# Altium PCB Coordinator5-10.21.PcbDoc (part 1 of 2)
Units mm, origin at the board's own origin, x right, y up, seen from the top; angles counter-clockwise.
Board outline 176.26 x 127.25 mm, 2 copper layers (Top Layer, Bottom Layer); 117 components, 155 nets, 547 pads, 228 vias.
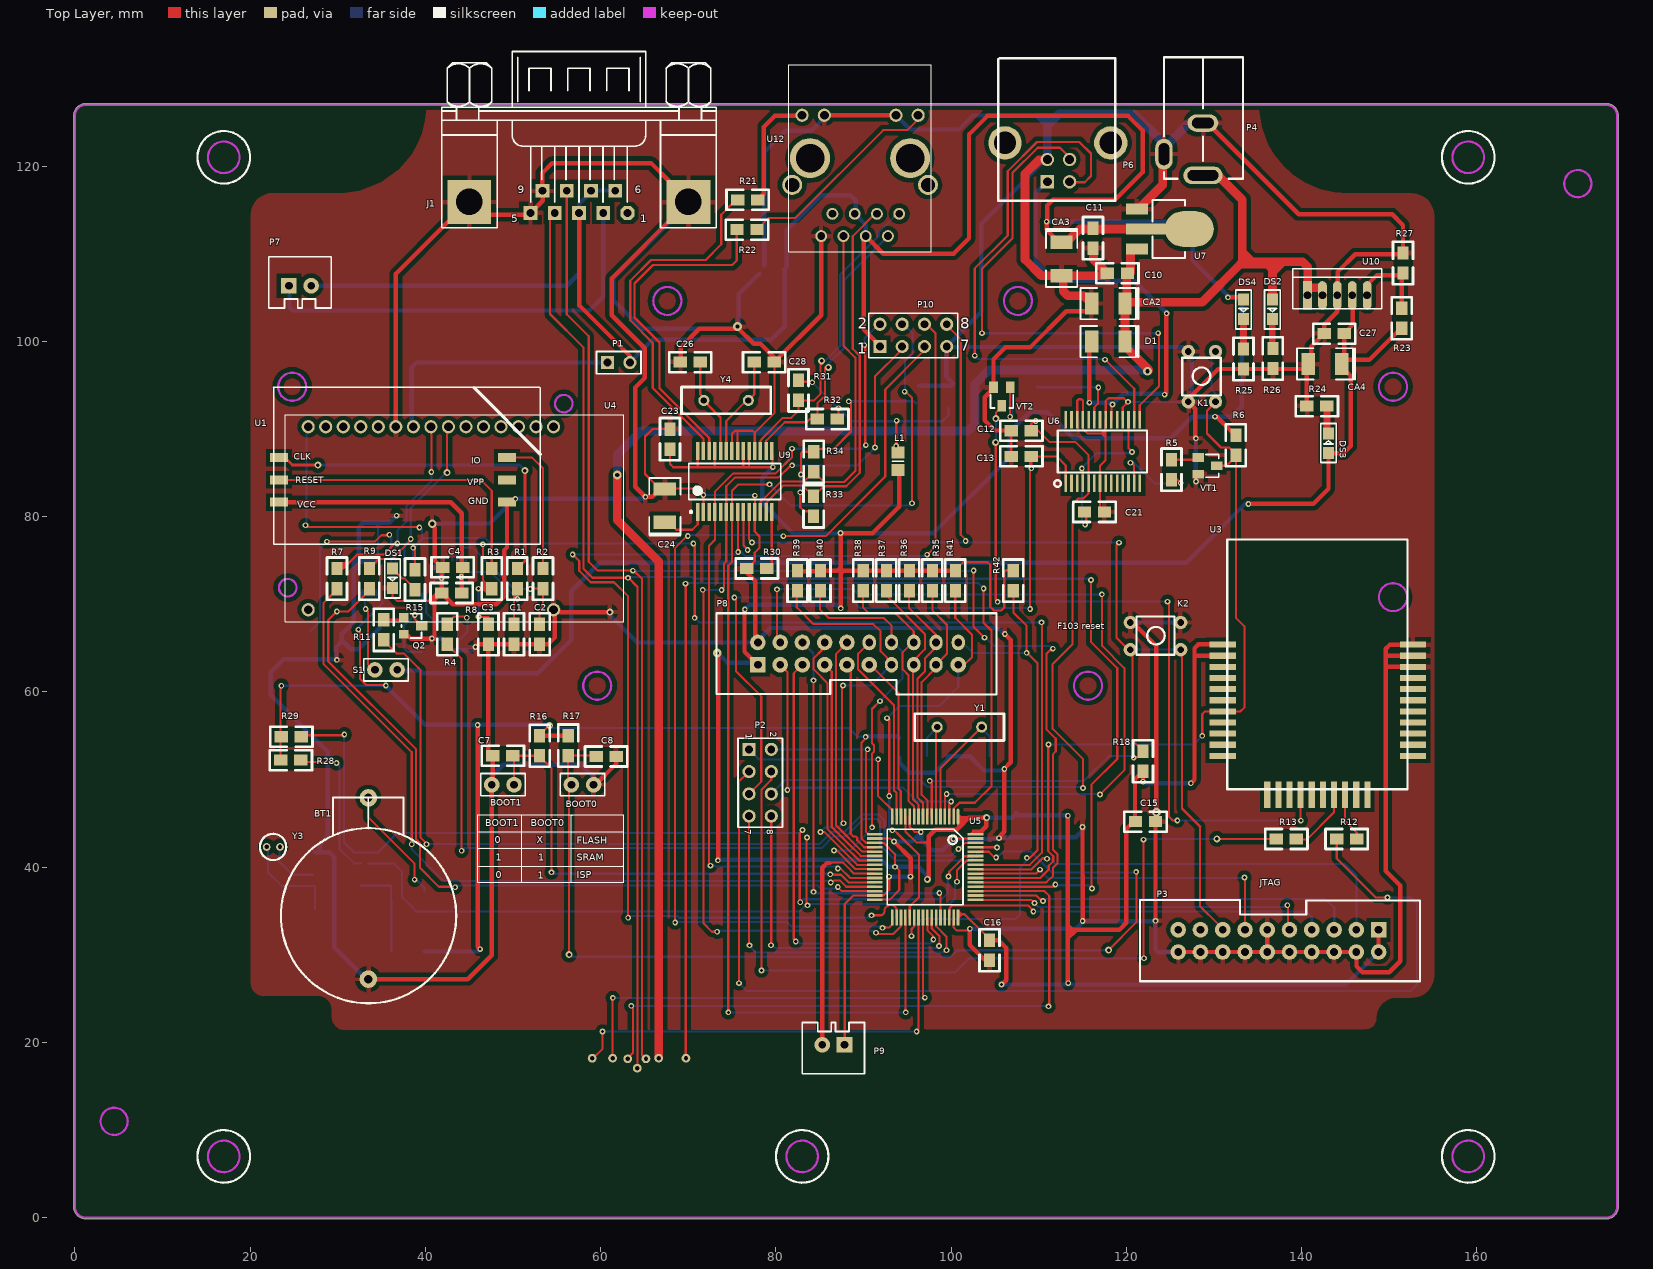
[diagram p0: Top Layer view]
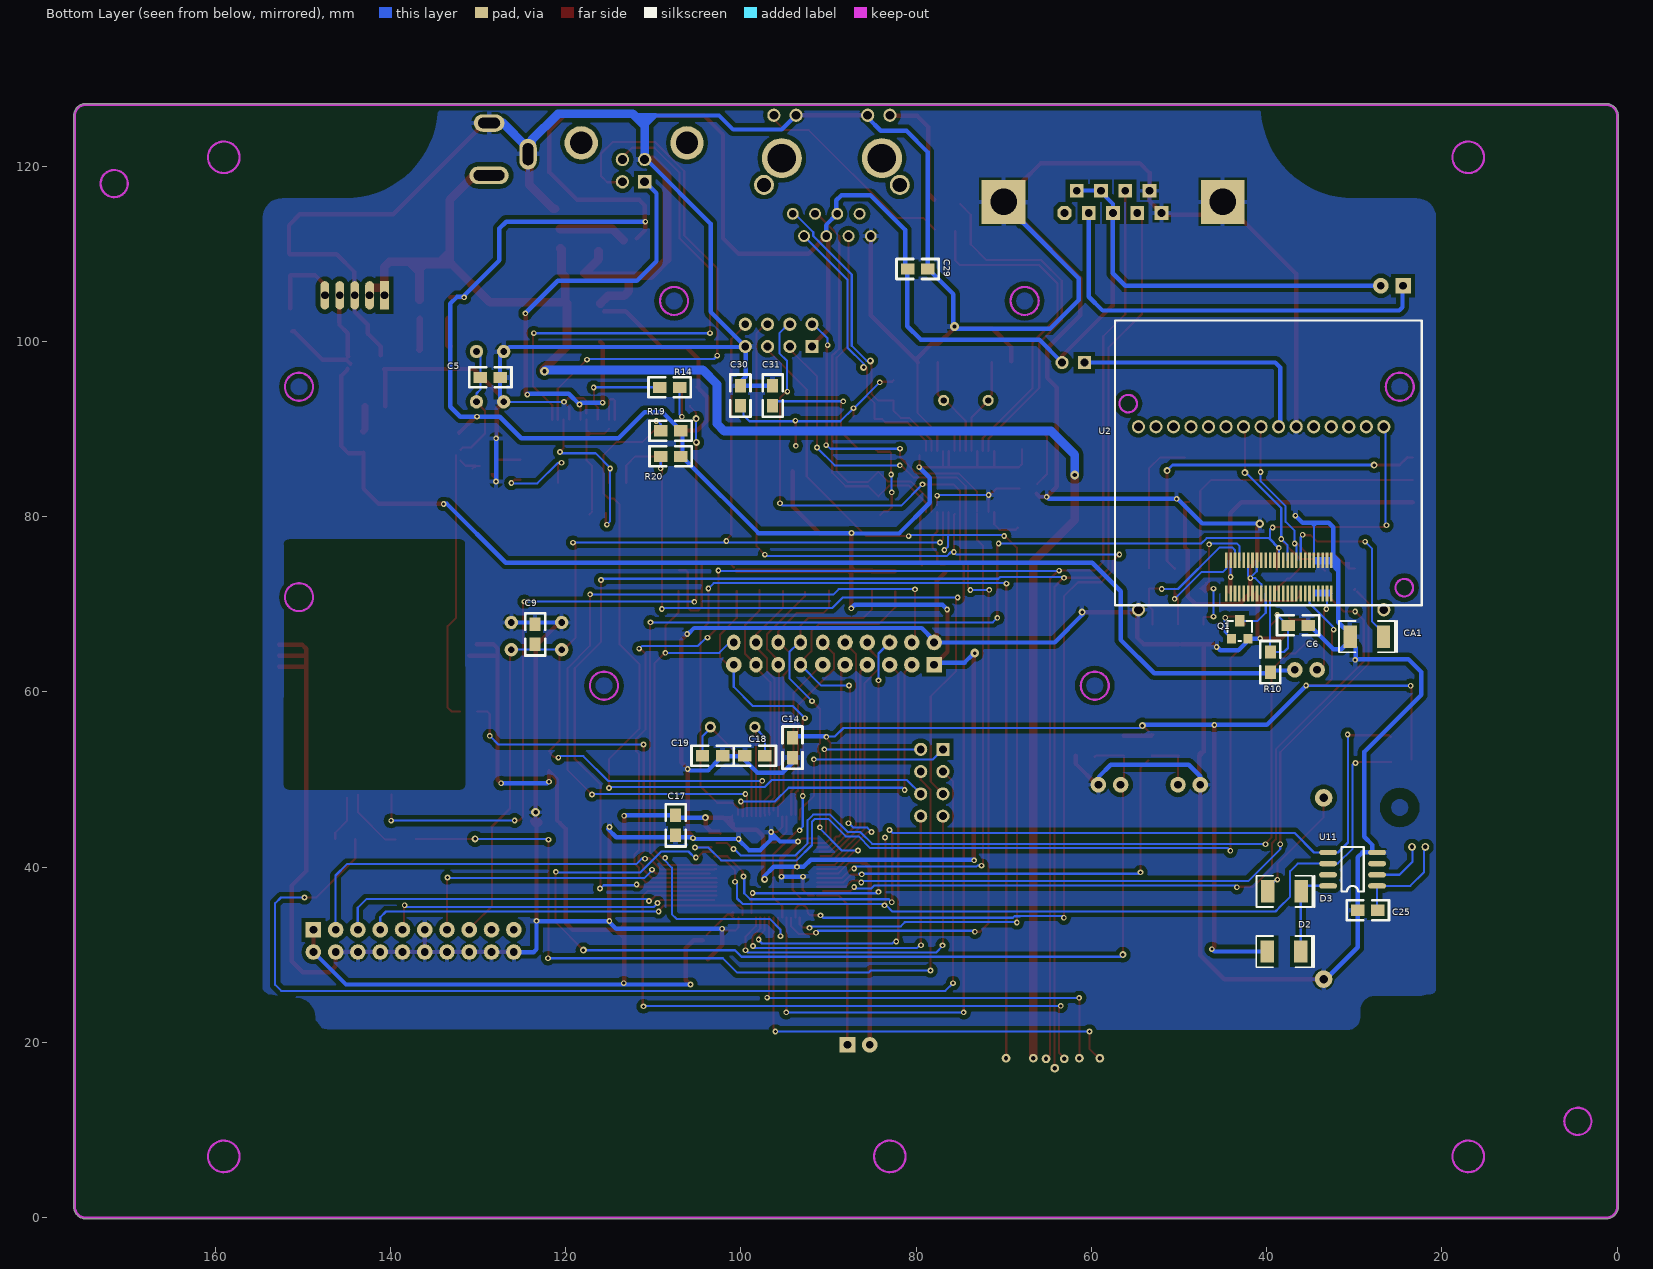
[diagram p1: Bottom Layer view, seen from below]

## Layer stack, top to bottom
Top Layer: signal copper 0.0356
Dielectric: dielectric 0.32, FR-4, Dk 4.8
Bottom Layer: signal copper 0.0356

## Board outline
-0.127,1.27 ccw(c1.27,1.27) 1.27,-0.127 174.77,-0.127 ccw(c174.77,0) 174.786,-0.126 ccw(c174.732,1.27) 176.129,1.27 ccw(c176.002,1.27) 176.127,1.291 176.127,125.697 ccw(c176.004,125.73) 176.132,125.73 ccw(c174.734,125.73) 174.818,127.125 ccw(c174.793,127) 174.793,127.127 1.27,127.127 ccw(c1.27,125.73) -0.127,125.73

## Design rules (kind name [scope] priority, off if disabled: settings)
Clearance Clearance_4 [InNet('GND0','U','V','W','R','S','T')] p1: gap=2.5
Clearance Clearance_3 [(InPolygon)] p2: gap=0.508
Clearance Clearance_2 [(InPadClass('All Pads') AND InComponent('U2','U5','U9'))] p3: gap=0.2
Clearance Clearance_1 [InNet('SIM-GND','VCC','VDD3_3','VDD4')] p4: gap=0.254
Clearance [All] p5: gap=0.254
ComponentClearance [All] p1: gap=0 collisioncheckmode=3 verticalgap=0
DiffPairsRouting [All] p1: maxlimit=0.254 minlimit=0.254 mostfreqgap=0.254 maxuncoupledlength=12.7
Height [All] p1: minheight=0 maxheight=60 prefheight=12.7
HoleSize [All] p1: absolutevalues=TRUE maxlimit=6.5 minlimit=0.025 maxpercent=80.000 minpercent=20.000
PolygonConnect PolygonConnect_1 [InNet('GND0')] p1: connectstyle=Relief reliefconductorwidth=2 reliefentries=4 polygonreliefangle="90 Angle"
PolygonConnect [InNet('GND')] p2: connectstyle=Relief reliefconductorwidth=0.5 reliefentries=4 polygonreliefangle="90 Angle"
RoutingVias [All] p1: holewidth=0.35 width=0.65 viastyle="Through Hole" minholewidth=0.3 minwidth=0.6 maxholewidth=4 maxwidth=5
SolderMaskExpansion [All] p1: expansion=0.102
TestPointUsage [All] p1: valid=0 allowmultiple=FALSE
Testpoint [All] p1: side=3 testpointundercomponent=TRUE minsize=1.016 maxsize=2.54 preferedsize=1.524 minholesize=0 maxholesize=1.016 preferedholesize=0.813 testpointgrid=0.025 style=297 order=0123456789
Width [All] p1: maxlimit=4 minlimit=0.24 preferedwidth=0.5
15 further rules are at their usual default settings.

## Classes and differential pairs
component class Designator: C32 C33 C34 C35 C36 C37 P11 Q3 Q4 Q5 Q6 Q7 Q8 Q9 Q10 Q11 Q12 Q13 Q14 R35 R36 R37 R38 R39 R40 R41 R42 R43 R44 R45 R46 R47 R48 R49 R50 R51 R52 R53 R54 R55 R56 R57 R58 R59 R60 R61 R62 R63 R64 U13 U14 U15 U16 U17 U18
differential pair TPOUT: +TPOUT_P -TPOUT_N
differential pair TPIN: +TPIN_P -TPIN_N

## Components (designator, comment, footprint, x,y, rotation, side; value= is the part's Value field where it differs from the comment)
BOOT0 "SW-SPST" HEAD1*2 59.207,49.409 r180 top (schematic designator BOOT2)
BOOT1 "SW-SPST" HEAD1*2 47.583,49.409 r0 top
BT1 "3.6V" BT 33.503,34.486 r0 top
C1 "27pF" C0805 50.123,67.976 r90 top
C2 "27pF" C0805 53.044,67.976 r90 top
C3 "27pF" C0805 47.202,67.976 r90 top
C4 "104" C0805 44.526,74.211 r0 top
C5 "0.1u" C0805 129.973,95.891 r0 bottom
C6 "104" C0805 37.804,67.595 r0 bottom
C7 "104" C0805 50.25,52.711 r0 top
C8 "104" C0805 59.233,52.621 r180 top
C9 "104" C0805 123.469,65.169 r270 bottom
C10 "104" C0805 117.577,107.765 r180 top
C11 "104" C0805 116.18,110.381 r270 top
C12 "101" C0805 109.399,89.795 r0 top
C13 "101" C0805 109.399,86.874 r0 top
C14 "104" C0805 94.107,52.24 r270 bottom
C15 "104" C0805 123.571,45.193 r0 top
C16 "104" C0805 104.369,29.126 r270 top
C17 "104" C0805 107.442,43.376 r270 bottom
C18 "Cap" C0805 99.798,52.711 r0 bottom
C19 "Cap" C0805 104.624,52.711 r0 bottom
C21 "104" C0805 117.754,80.536 r0 top
C23 "Cap Semi" C0805 67.92,90.239 r90 top
C24 "Cap Pol3" 1210C 67.361,79.367 r90 top
C25 "15pF" C0805 27.06,35.083 r180 bottom
C26 "Cap Semi" C0805 68.834,97.63 r180 top
C27 "104" C0805 142.316,100.881 r180 top
C28 "Cap Semi" C0805 80.061,97.63 r0 top
C29 "Cap Semi" C0805 78.435,108.247 r180 bottom
C30 "Cap Semi" C0805 100.051,92.398 r270 bottom
C31 "Cap Semi" C0805 96.368,92.398 r270 bottom
CA1 "220uf" 1210C 26.695,66.325 r0 bottom
CA2 "10UF/16V" 1210C 119.812,104.336 r180 top
CA3 "4.7UF/16V" 1210C 112.573,111.27 r270 top
CA4 "10uf" 1210C 144.526,97.452 r180 top
D1 "IN4001" 1210D 116.154,99.967 r0 top
D2 "1N4001" 1210D 39.802,30.371 r180 bottom
D3 "1N4001" 1210D 39.76,37.242 r180 bottom
DS1 "LPG" LED0805 36.28,74.072 r270 top
DS2 "VCC" LED0805 136.677,104.767 r270 top
DS3 "VCC4" LED0805 143.027,87.267 r90 top
DS4 "VCC3V3" LED0805 133.375,104.767 r270 top
J1 "D Connecter 9" "UART - Male" 57.531,119.957 r0 top
K1 "KEY" KEY-DIP 128.576,96.018 r90 top
K2 "KEY" KEY-DIP 123.368,66.405 r0 top
L1 "Inductor" 6-0805_M 93.929,86.327 r90 top
P1 "Header 2" HDR1X2 60.808,97.579 r0 top
P2 "Header 4X2" HDR2X4 76.938,53.448 r270 top
P3 "Header 10X2" IDC-20#1 148.793,32.86 r180 top
P4 "DC-005" DC-005 133.299,132.403 r270 top
P6 "USB" USB_B_90D 110.947,118.179 r90 top
P7 "Header 2" SIP-2B 24.435,106.342 r0 top
P8 "Header 10X2" IDC-20#2 77.928,63.1 r0 top locked
P9 "Header 2" SIP-2B 87.833,19.728 r180 top
P10 "Header 4X2" HDR2X4 91.872,99.408 r0 top
Q1 "2N3904" NPN-SOT23 42.122,66.071 r180 bottom
Q2 "2N3904" NPN-SOT23 37.55,66.579 r270 top
R1 "33" R0805 50.504,71.532 r270 top
R2 "33" R0805 53.425,71.532 r270 top
R3 "33" R0805 47.583,71.532 r270 top
R4 "Res2" R0805 42.503,65.182 r270 top
R5 "1K" R0805 125.147,83.953 r270 top
R6 "Res2" R0805 132.486,89.541 r90 top
R7 "22Ω" R0805 29.93,74.326 r90 top
R8 "15k" C0805 44.408,71.278 r0 top
R9 "22Ω" R0805 33.613,74.326 r90 top
R10 "Res2" R0805 39.582,62.007 r270 bottom
R11 "Res2" R0805 35.264,65.69 r270 top
R12 "22ohm" R0805 146.533,43.223 r0 top
R13 "22ohm" R0805 139.649,43.223 r0 top
R14 "1K" R0805 109.526,94.748 r0 bottom
R15 "1K" R0805 38.82,74.199 r90 top
R16 "Res2" R0805 53.044,55.251 r90 top
R17 "Res2" R0805 56.312,55.263 r90 top
R18 "10k" R0805 121.895,53.485 r90 top
R19 "3.3k" R0805 109.399,89.795 r0 bottom
R20 "3.3k" R0805 109.399,86.874 r0 bottom
R21 "Res Semi" R0805 78.181,116.147 r0 top
R22 "Res Semi" R0805 78.105,112.743 r0 top
R23 "220K" R0805 151.409,101.237 r270 top
R24 "1K" R0805 143.129,92.601 r0 top
R25 "1K" R0805 133.35,99.383 r90 top
R26 "Res2" R0805 136.703,99.433 r90 top
R27 "100K" R0805 151.562,107.536 r270 top
R28 "Res2" R0805 26.06,52.215 r0 top
R29 "Res2" R0805 26.111,54.882 r0 top
R30 "Res Semi" R0805 79.223,74.084 r0 top
R31 "Res Semi" R0805 82.575,93.007 r270 top
R32 "Res Semi" R0805 84.48,91.128 r180 top
R33 "Res Semi" R0805 84.303,82.568 r90 top
R34 "Res Semi" R0805 84.328,84.854 r270 top
R35 "Res Semi" R0805 97.856,74.084 r90 top (schematic designator R30)
R36 "Res Semi" R0805 95.23,74.084 r90 top (schematic designator R30)
R37 "Res Semi" R0805 92.603,74.084 r90 top (schematic designator R30)
R38 "Res Semi" R0805 89.977,74.084 r90 top (schematic designator R30)
R39 "Res Semi" R0805 82.464,74.084 r90 top (schematic designator R30)
R40 "Res Semi" R0805 85.082,74.084 r90 top (schematic designator R30)
R41 "Res Semi" R0805 100.482,74.084 r90 top (schematic designator R30)
R42 "Res Semi" R0805 107.089,74.084 r90 top (schematic designator R30)
S1 "SW-SPST" HEAD1*2 34.248,62.515 r0 top
U1 "SIMCARD" SIMCARD 38.312,86.01 r270 top
U2 "EM310" EM310 41.36,83.724 r90 bottom
U3 "STM32W108-3" STM32W108-3 152.07,48.887 r90 top
U4 "EMW3280" EMW-3280 26.635,69.373 r0 top
U5 "STM32" LQFP64 100.782,45.771 r270 top
U6 "FT232R" SSOP-28 113.082,83.826 r90 top
U7 "AS1117-3.3V" SOT-223 127.152,112.819 r270 top
U9 "ENC28J60" ENC28J60-ss 75.311,84.016 r90 top
U10 "MIC29302" TO220-5 140.691,105.275 r90 top
U11 "PCF8563" SO-8 27.407,37.864 r0 bottom
U12 "HR911105A-RJ45" HR911105A 89.611,120.896 r0 top
VT1 "2N3904" SOT23-3 128.195,86.747 r270 top
VT2 "2N3904" SOT23-3 106.732,94.748 r180 top
Y1 "8MHZ" XTAL 98.401,55.988 r0 top
Y3 "32.768KHZ" XTAL2 23.419,42.36 r0 top
Y4 "25M" xtal 71.78,93.261 r0 top

## Footprints (in the part's own frame and the unit in brackets; to place one, negate y for a bottom-side part, rotate by r counter-clockwise, add the part's x,y. Pads: shape width x height; smd on the part's side, far side on the other; paste and mask are expansions set on the pad)
6-0805_M [mm] "Chip Resistor, Body 2.0x1.2mm, IPC Low Density"
  rect 1.4x1.5 smd: 1(-1,0) 2(1,0)
  silkscreen extent 0,-0.65 0,0.65, body extent -1.07,-0.7 1.07,0.7, height 0.7
1210C [mil]
  rect 60x100 smd: 1(-1,1) 2(149,1)
  silkscreen extent -61,-69 199,71
1210D [mil]
  rect 60x100 smd: 1(-5,0.06) 2(145,0.06)
  silkscreen extent -55,-70 205,70
BT [mm]
  round 2 hole 1: 1(0,13.431) 2(0,-7.269)
  silkscreen extent -9.97,-10.02 10.03,13.46
C0805 [mil]
  rect 60x50 smd: 1(-100,0) 2(-10,0)
  silkscreen extent -150,-45 40,45
DC-005 [mm] "间"
  oval 3.5x2 hole 1.2 slot 2.5 at 0 deg: 1(11.049,-9.017)
  oval 2x3.5 hole 1.2 slot 2.5 at 90 deg: 2(7.493,-4.572)
  oval 2x4.5 hole 1.2 slot 3.5 at 90 deg: 3(13.462,-4.572)
  silkscreen extent 0,-9.02 13.84,0
EM310 [mm]
  rect 1.8x0.3 smd: 1(-8.712,3.254) 2(-8.712,2.754) 3(-8.712,2.254) 4(-8.712,1.754) 5(-8.712,1.254) 6(-8.712,0.754) 7(-8.712,0.254) 8(-8.712,-0.246) 9(-8.712,-0.746) 10(-8.712,-1.246) 11(-8.712,-1.746) 12(-8.712,-2.246) 13(-8.712,-2.746) 14(-8.712,-3.246) 15(-8.712,-3.746) 16(-8.712,-4.246) 17(-8.712,-4.746) 18(-8.712,-5.246) 19(-8.712,-5.746) 20(-8.712,-6.246) 21(-8.712,-6.746) 22(-8.712,-7.246) 23(-8.712,-7.746) 24(-8.712,-8.246) 25(-8.712,-8.746) 26(-12.512,-8.746) 27(-12.512,-8.246) 28(-12.512,-7.746) 29(-12.512,-7.246) 30(-12.512,-6.746) 31(-12.512,-6.246) 32(-12.512,-5.746) 33(-12.512,-5.246) 34(-12.512,-4.746) 35(-12.512,-4.246) 36(-12.512,-3.746) 37(-12.512,-3.246) 38(-12.512,-2.746) 39(-12.512,-2.246) 40(-12.512,-1.746) 41(-12.512,-1.246) 42(-12.512,-0.746) 43(-12.512,-0.246) 44(-12.512,0.254) 45(-12.512,0.754) 46(-12.512,1.254) 47(-12.512,1.754) 48(-12.512,2.254) 49(-12.512,2.754) 50(-12.512,3.254)
  Keep-Out Layer circle w0.254: c9.168,14.444 r1
  Keep-Out Layer circle w0.254: c-11.832,-17.056 r1
  silkscreen extent -13.83,-19.06 18.67,15.94
EMW-3280 [mm]
  round 1.5 hole 1: 1(0,0) 15(28,0) 16(28,20.88) 17(26,20.88) 18(24,20.88) 19(22,20.88) 20(20,20.88) 21(18,20.88) 22(16,20.88) 23(14,20.88) 24(12,20.88) 25(10,20.88) 26(8,20.88) 27(6,20.88) 28(4,20.88) 29(2,20.88) 30(0,20.88)
  silkscreen extent -2.62,-1.4 35.98,22.25
ENC28J60-ss [mm] "SOP, 28-Leads, Body 10.5x5.6mm (max), Pitch 0.65mm, IPC Medium Density"
  rect 2.05x0.4 smd: 1(-3.475,4.225) 2(-3.475,3.575) 3(-3.475,2.925) 4(-3.475,2.275) 5(-3.475,1.625) 6(-3.475,0.975) 7(-3.475,0.325) 8(-3.475,-0.325) 9(-3.475,-0.975) 10(-3.475,-1.625) 11(-3.475,-2.275) 12(-3.475,-2.925) 13(-3.475,-3.575) 14(-3.475,-4.225) 15(3.475,-4.225) 16(3.475,-3.575) 17(3.475,-2.925) 18(3.475,-2.275) 19(3.475,-1.625) 20(3.475,-0.975) 21(3.475,-0.325) 22(3.475,0.325) 23(3.475,0.975) 24(3.475,1.625) 25(3.475,2.275) 26(3.475,2.925) 27(3.475,3.575) 28(3.475,4.225)
  silkscreen extent -3.6,-5.25 2.05,5.25, body extent -2.8,-5.25 2.8,5.25, height 2
HDR1X2 [mm] "Connector; Header; 2 Position"
  rect 1.5x1.5 hole 0.9: 1(0,0)
  round 1.5 hole 0.9: 2(2.54,0)
  silkscreen extent -1.27,-1.27 3.81,1.27
HDR2X4 [mm] "Connector; Header; 4x2 Position"
  rect 1.5x1.5 hole 0.9: 1(0,0)
  round 1.5 hole 0.9: 2(0,2.54) 3(2.54,0) 4(2.54,2.54) 5(5.08,0) 6(5.08,2.54) 7(7.62,0) 8(7.62,2.54)
  silkscreen extent -1.27,-1.27 8.89,3.81
HEAD1*2 [mil]
  round 70 hole 35: 1(0,0) 2(100,0)
  silkscreen extent -50,-50 150,50
HR911105A [mm]
  round 1.35 hole 0.89: 1(4.46,-6.35) 2(3.18,-8.89) 3(1.92,-6.35) 4(0.64,-8.89) 5(-0.62,-6.35) 6(-1.9,-8.89) 7(-3.16,-6.35) 8(-4.44,-8.89)
  round 1.5 hole 1.02: 9(6.625,4.9) 10(4.085,4.9) 11(-4.085,4.9) 12(-6.625,4.9)
  round 2.286 hole 1.63: ""(-7.745,-3.05) ""(7.745,-3.05)
  round 4.572 hole 3.25: ""(-5.715,0) ""(5.715,0)
  silkscreen extent -8.13,-10.67 8.13,10.67
IDC-20#1 [mil]
  rect 70x70 hole 35: 1(1,0)
  round 70 hole 35: 2(1,100) 3(101,0) 4(101,100) 5(201,0) 6(201,100) 7(301,0) 8(301,100) 9(401,0) 10(401,100) 11(501,0) 12(501,100) 13(601,0) 14(601,100) 15(701,0) 16(701,100) 17(801,0) 18(801,100) 19(901,0) 20(901,100)
  silkscreen extent -185,-133 1073,231
IDC-20#2 [mil]
  rect 70x70 hole 35: 1(1,0)
  round 70 hole 35: 2(1,100) 3(101,0) 4(101,100) 5(201,0) 6(201,100) 7(301,0) 8(301,100) 9(401,0) 10(401,100) 11(501,0) 19(901,0)
  oval 59.06x70 hole 35: 12(501,100) 13(601,0) 14(601,100) 15(701,0) 16(701,100) 17(801,0) 18(801,100) 20(901,100)
  silkscreen extent -185,-133 1073,231
KEY-DIP [mil]
  round 60 hole 30: 1(-115,59.45) 2(-115,-62.6) 3(111,-62.6) 4(111,59.45)
  silkscreen extent -87,-86 83,87
LED0805 [mm]
  rect 1.4x1.27 smd: 1(0,-0.025) 2(2.21,-0.025)
  silkscreen extent -1.1,-0.91 3.37,0.86
LQFP64 [mm]
  oval 1.8x0.3 smd: 1(0,0)
  rect 1.8x0.3 smd: 2(0,-0.5) 3(0,-1) 4(0,-1.5) 5(0,-2) 6(0,-2.5) 7(0,-3) 8(0,-3.5) 9(0,-4) 10(0,-4.5) 11(0,-5) 12(0,-5.5) 13(0,-6) 14(0,-6.5) 15(0,-7) 16(0,-7.5) 33(11.5,-7.5) 34(11.5,-7) 35(11.5,-6.5) 36(11.5,-6) 37(11.5,-5.5) 38(11.5,-5) 39(11.5,-4.5) 40(11.5,-4) 41(11.5,-3.5) 42(11.5,-3) 43(11.5,-2.5) 44(11.5,-2) 45(11.5,-1.5) 46(11.5,-1) 47(11.5,-0.5) 48(11.5,0)
  rect 0.3x1.8 smd: 17(2,-9.5) 18(2.5,-9.5) 19(3,-9.5) 20(3.5,-9.5) 21(4,-9.5) 22(4.5,-9.5) 23(5,-9.5) 24(5.5,-9.5) 25(6,-9.5) 26(6.5,-9.5) 27(7,-9.5) 28(7.5,-9.5) 29(8,-9.5) 30(8.5,-9.5) 31(9,-9.5) 32(9.5,-9.5) 49(9.5,2) 50(9,2) 51(8.5,2) 52(8,2) 53(7.5,2) 54(7,2) 55(6.5,2) 56(6,2) 57(5.5,2) 58(5,2) 59(4.5,2) 60(4,2) 61(3.5,2) 62(3,2) 63(2.5,2) 64(2,2)
  silkscreen extent 1.43,-8.07 10.07,0.56
NPN-SOT23 [mm]
  rect 1x1.1 smd: 1(0,0) 2(-1.905,0)
  rect 1.1x1.3 smd: 3(-0.952,2.032)
  silkscreen extent -2.35,-0.28 0.44,2.01
R0805 [mil]
  rect 60x50 smd: 1(-100,0) 2(-10,0)
  silkscreen extent -150,-45 40,45
SIMCARD [mil]
  rect 40x80 smd: 1(171.63,-590.25) 2(71.63,-590.25) 3(-28.37,-590.25) 4(171.63,433.37) 5(71.63,433.37) 6(-28.37,433.37)
  silkscreen extent -344,-615 361,583
SIP-2B [mil]
  rect 70x70 hole 35: 1(0,0)
  round 70 hole 35: 2(100,0)
  silkscreen extent -90,-100 190,130
SO-8 [mil]
  oval 80x24 smd: 1(0,0) 2(0,-50) 3(0,-100) 4(0,-150) 5(220,-150) 6(220,-100) 7(220,-50) 8(220,0)
  silkscreen extent 60,-175 160,25
SOT23-3 [mm]
  rect 1x1.3 smd: 1(0,0) 2(1.9,0) 3(0.95,2.1)
  silkscreen extent -0.35,0.87 2.25,2.35
SOT-223 [mil]
  rect 50x100 smd: 1(-90.5,-234) 3(90.5,-234)
  oval 160x220 smd: 2(0,1)
  rect 50x200 smd: 2(0,-184)
  silkscreen extent -130,-164 130,-19
SSOP-28 [mm]
  rect 2x0.3 smd: 1(0,0) 2(0,-0.65) 3(0,-1.3) 4(0,-1.95) 5(0,-2.6) 6(0,-3.25) 7(0,-3.9) 8(0,-4.55) 9(0,-5.2) 10(0,-5.85) 11(0,-6.5) 12(0,-7.15) 13(0,-7.8) 14(0,-8.45) 15(7.239,-8.45) 16(7.239,-7.8) 17(7.239,-7.15) 18(7.239,-6.5) 19(7.239,-5.85) 20(7.239,-5.2) 21(7.239,-4.55) 22(7.239,-3.9) 23(7.239,-3.25) 24(7.239,-2.6) 25(7.239,-1.95) 26(7.239,-1.3) 27(7.239,-0.65) 28(7.239,0)
  silkscreen extent -0.43,-9.27 5.99,1.32
STM32W108-3 [mm]
  rect 0.7x3 smd: 1(16.51,21.074) 2(15.24,21.074) 3(13.97,21.074) 4(12.7,21.074) 5(11.43,21.074) 6(10.16,21.074) 7(8.89,21.074) 8(7.62,21.074) 9(6.35,21.074) 10(5.08,21.074) 11(3.81,21.074) 22(3.81,-0.627) 23(5.08,-0.627) 24(6.35,-0.627) 25(7.62,-0.627) 26(8.89,-0.627) 27(10.16,-0.627) 28(11.43,-0.627) 29(12.7,-0.627) 30(13.97,-0.627) 31(15.24,-0.627) 32(16.51,-0.627)
  rect 3x0.7 smd: 12(-0.627,16.002) 13(-0.627,14.732) 14(-0.627,13.462) 15(-0.627,12.192) 16(-0.627,10.922) 17(-0.627,9.652) 18(-0.627,8.382) 19(-0.627,7.112) 20(-0.627,5.842) 21(-0.627,4.572)
  silkscreen extent 0,0 28.5,20.57
TO220-5 [mil]
  rect 126.67x39.17 hole 35: 1(-0.86,1)
  oval 126.67x39.17 hole 35: 2(-0.86,-65.93) 3(-0.86,-132.86) 4(-0.86,-199.79) 5(-0.86,-266.72)
  silkscreen extent -61,-333 119,67
"UART - Male" [mil]
  oct 62x62 hole 35: 1(218.39,-209.25)
  rect 62x62 hole 35: 2(109.22,-209.25) 3(0.05,-209.25) 4(-109.11,-209.25) 5(-218.28,-209.25) 6(163.39,-109.25) 7(54.22,-109.25) 8(-54.95,-109.25) 9(-164.11,-109.25)
  rect 196.67x196.67 hole 118.33: 10(-492.45,-159.25) 11(491.72,-159.25)
  silkscreen extent -617,-276 617,516
USB_B_90D [mil] "180度 横插 方口USB母座"
  rect 60.06x60.06 hole 40: 1(1,-1)
  round 60.06 hole 40: 2(1,-101) 3(101,-101) 4(101,-1)
  round 150 hole 100: 5(176,-286) 6(176,189)
  silkscreen extent -84,-306 556,219
XTAL [mil]
  round 50 hole 28: 1(0,0) 2(200,0)
  silkscreen extent -100,-60 300,60
xtal [mil]
  round 50 hole 28: 1(0,0) 2(200,0)
  silkscreen extent -100,-60 300,60
XTAL2 [mil]
  round 35 hole 20: 1(0,-2) 2(-60,-2)
  silkscreen extent -90,-61 28,57

## Part data
BOOT0 BOOT1 S1: "Single-Pole, Single-Throw Switch"
BT1: library part Battery, "Multicell Battery"
C1 C2 C3 C4: library part Cap
C5 C6 C7 C8 C9 C12 C13: library part Cap, "Capacitor"
C10 C11: library part C
C14 C15 C16 C17: library part CAP, "Capacitor"
C18 C19: "Capacitor"
C21 C25 C27: library part C, "C"
C23 C26 C28 C29 C30 C31: "Capacitor (Semiconductor SIM Model)"
C24: "Polarized Capacitor (Surface Mount)"
CA1 CA4: library part Cap2
CA2 CA3: library part ECAP
D1: library part DIODE, "Diode"
D2 D3: library part "Diode 1N4001", "1 Amp General Purpose Rectifier"
DS1 DS3 DS4: library part LED3, "Typical BLUE SiC LED"
DS2: library part LED
J1: library part UART-male, "9针串口，插针型，公头"
P1 P7 P9: "Header, 2-Pin"
P2 P10: "Header, 4-Pin, Dual row"
P3 P8: "Header, 10-Pin, Dual row"
P4: library part "Header 3", "Header, 3-Pin"
Q1 Q2: "NPN General Purpose Amplifier"
R1 R2 R3 R5 R7 R9 R12 R13 R14 R15 R23 R24 R25 R27: library part RES, "R"
R4 R6 R10 R11 R16 R17 R26 R28 R29: "Resistor"
R8: library part Res2
R18 R19 R20: library part Res3, "Resistor"
R21 R22 R30 R31 R32 R33 R34 R35 R36 R37 R38 R39 R40 R41 R42: "Semiconductor Resistor"
U1: library part SIM
U2: "GSM"
U5: library part STM32F103RE
U7: library part AS1117
VT1 VT2: library part NPN, "NPN Transistor"
Y1 Y3 Y4: library part XTAL, "Crystal Oscillator"

## Free pads (board coordinates)
  round 1 hole 0.5: 0(59.032,18.199) 1(61.369,18.212) 2(63.096,18.133) 3(64.181,17.069) 4(65.176,18.133) 5(66.619,18.212) 6(69.743,18.214)

## Via types
v1: diameter 0.65, hole 0.35, Top Layer to Bottom Layer, 208 vias
v2: diameter 0.8, hole 0.4, Top Layer to Bottom Layer, 14 vias
v3: diameter 1, hole 0.5, Top Layer to Bottom Layer, 5 vias
v4: diameter 1, hole 0.4, Top Layer to Bottom Layer, 1 vias

## Nets (pads, with @x,y where several pads share a name; then routed paths per layer and width w, separated by ;. In a path a pad name is that pad's centre, name@x,y a point inside that pad or via, vN(x,y) a via of type N, cw(c..) or ccw(c..) an arc to the next point about the centre after c; other vN are vias at no path point)
/RESET_108: C5.2 K1.2 K1.3 R6.1 U3.7 U5.54 VT1.3 | length 92.2
  Top Layer w0.24: U5.54@102.782,38.771 102.783,38.769 110.174,38.769 111.139,39.734 111.139,40.166 111.646,40.673 111.646,41.252 111.074,41.824 v1@111.074,53.79 ; v1(128.651,54.983) 128.651,57.473 128.93,57.752 U3.7@130.124,57.752 ; VT1.3@129.744,85.797 VT1.3@130.295,85.797 ; VT1.3@130.455,85.655 VT1.3@130.633,85.477 ; U3.7@132.055,57.777 133.02,57.777 133.452,58.209 133.452,67.506 132.486,68.471 R6.1@132.486,87.001
  Top Layer w0.254: K1.2@129.947,92.843 129.184,92.08 129.184,89.49 130.798,87.877 131.712,87.877 R6.1@131.953,87.636 ; VT1.3@130.295,85.655 VT1.3@130.295,85.797 131.409,85.797 R6.1@131.978,86.366
  Bottom Layer w0.24: v1(111.1,53.993) 127.66,53.993 v1(128.651,54.983) ; K1.2@130.166,93.097 130.166,94.047 129.719,94.494 C5.2@129.719,95.891 129.719,98.39 K1.3@130.166,98.837
/RST: C6.2 Q2.3 R10.1 U2.40 | length 14.1
  Top Layer w0.24: v1@38.76,68.611 38.76,68.353 Q2.3@39.582,67.532
  Bottom Layer w0.24: v1@38.735,68.713 37.55,67.528 C6.2@37.55,67.595 37.567,67.579 37.567,65.005 38.024,64.547 R10.1@39.582,64.547 ; 39.607,70.11 39.607,65.132 R10.1@39.683,65.055 ; 39.613,70.116 U2.40@39.613,71.212
  other v1: 38.811,68.764
AC1: 
AC2: 
AC3: 
AC4: 
AC5: 
AC6: 
ADC0: P9.2 U5.26 | length 27
  Top Layer w0.24: 86.157,40.48 86.221,40.544 87.615,40.544 ; 87.605,40.544 87.615,40.544 ; U5.26@91.282,39.271 91.276,39.277 88.876,39.277 88.587,39.566 88.587,39.572 87.615,40.544
  Top Layer w0.5: P9.2@85.293,19.728 85.293,39.947 85.827,40.48 86.157,40.48
BOOT0: BOOT0.2 C8.2 R17.1 U5.60 | length 118.5
  Top Layer w0.24: R17.1@56.286,52.494 56.286,49.954 BOOT0.2@56.845,49.395 ; R17.1@56.312,52.723 59.487,52.723 C8.2@59.614,52.596 ; v2(56.413,30.015) 56.413,49.04 BOOT0.2@56.54,49.167 ; BOOT0.2@56.49,49.218 BOOT0.2@56.744,49.472 ; U5.60@103.125,41.801 103.162,41.764 104.292,41.764 105.131,40.925 v1@105.207,40.925 ; v2(117.958,30.523) 121.133,33.698 v1@121.133,39.667
  Bottom Layer w0.24: v2(56.413,30.015) 56.654,29.775 99.925,29.775 100.673,30.523 v2(117.958,30.523) ; v1@105.105,40.976 105.156,40.976 105.969,41.789 109.079,41.789 111.455,39.413 121.107,39.413 v1@121.158,39.464
  other v1: 121.107,39.464 105.131,41.103
BOOT1: BOOT1.2 C7.2 R16.1 U5.28 | length 56.9
  Top Layer w0.24: C7.2@49.996,52.711 C7.2@50.072,52.711 ; BOOT1.2@50.123,49.409 50.123,52.66 C7.2@50.072,52.711 ; R16.1@52.942,52.686 52.917,52.711 C7.2@50.072,52.711 ; R16.1@53.095,52.635 R16.1@53.095,52.813 ; R16.1@53.492,52.189 54.407,51.275 v1(54.407,39.413) ; 86.563,39.21 86.639,39.134 87.427,39.134 88.29,38.271 U5.28@91.282,38.271
  Bottom Layer w0.24: v1(54.407,39.413) 54.571,39.249 v1@86.487,39.249
  other v1: 86.208,39.185
CBUS0: R14.2 U6.23 | length 10.9
  Top Layer w0.24: U6.23@116.332,91.065 116.332,92.462 116.738,92.869 116.738,94.709 v1@116.84,94.811
  Bottom Layer w0.24: R14.2@109.83,94.76 v1@116.738,94.76
  other v1: 116.789,94.734
CBUS2: R5.2 U6.13 | length 10.4
  Top Layer w0.24: v1@120.575,86.148 120.575,86.123 120.882,85.816 U6.13@120.882,83.826 ; R5.2@125.147,84.207 125.807,84.207 v1(126.188,83.826)
  Bottom Layer w0.24: v1@120.447,86.124 120.893,86.124 123.216,83.801 v1@126.264,83.801
  other v1: 120.472,86.149
ENC-INT: P10.2 U5.27 U9.4 | length 96.4
  Top Layer w0.24: v1(72.542,40.175) 72.365,40.353 72.365,76.675 73.05,77.361 U9.4@73.05,80.333 ; U9.4@73.036,80.541 73.036,82.858 75.12,84.942 79.971,84.942 81.839,86.81 v1(81.839,87.749) ; v1(87.071,39.845) 87.122,39.896 87.363,39.896 88.489,38.771 U5.27@91.282,38.771 ; v1(90.094,99.56) 90.195,99.459 90.195,88.232 v1(90.272,88.156)
  Bottom Layer w0.24: v1(72.542,40.175) 73.002,40.175 73.091,40.086 86.83,40.086 v1(87.071,39.845) ; v1(81.839,87.749) 89.789,87.749 90.195,88.156 v1(90.272,88.156) ; v1(90.094,99.56) 90.094,100.322 P10.2@91.491,101.719
GND: BOOT0.1 BOOT1.1 BT1.2 C1.1 C2.1 C3.1 C4.1 C5.1 C6.1 C7.1 C8.1 C9.1 C10.2 C11.2 C12.1 C13.1 C14.2 C15.2 C16.2 C17.2 C18.2 C19.1 C21.2 C23.2 C24.2 C25.1 C26.2 C27.2 C28.2 C29.2 C30.1 C31.1 CA1.2 CA2.2 CA3.2 CA4.2 DS1.2 J1.5 J1.9 J1.10 J1.11 K1.1 K1.4 K2.1 K2.4 P3.4 P3.6 P3.8 P3.10 P3.11 P3.12 P3.14 P3.16 P3.18 P3.20 P4.1 P4.2 P6.4 P8.2 P9.1 P10.7 Q1.1 Q2.1 R8.1 R24.1 R25.1 R26.1 R27.1 R30.1 U1.4 U2.6 U2.8 U2.21 U2.22 U2.23 U2.24 U2.25 U2.42 U3.30 U3.31 U3.32 U4.15 U4.25 U5.12 U5.18 U5.31 U5.47 U5.63 U6.7 U6.18 U6.21 U6.25 U6.26 U7.1 U9.2 U9.11 U9.18 U9.21 U9.22 U10.3 U11.4 U12.8 U12.10 U12.11 VT1.2 VT2.2 | length 1089.3
  Top Layer w0.24: v1@29.777,63.658 v1(29.904,63.658) ; DS1.2@36.254,71.532 36.254,70.923 36.813,70.364 40.293,70.364 R8.1@41.296,71.367 ; C4.1@41.868,73.844 C4.1@41.868,74.199 ; C7.1@47.583,52.559 47.634,52.609 C7.1@47.634,52.714 ; C7.1@47.634,52.787 C7.1@47.634,52.965 ; U1.4@48.802,81.651 49.335,81.651 U1.4@49.335,81.286 ; C1.1@49.742,65.436 C1.1@50.123,65.436 ; U5.18@91.282,43.271 93.057,43.271 v1@93.32,43.008 ; U5.31@91.67,36.771 91.7,36.801 92.314,36.801 92.939,37.425 v1@92.939,38.919 ; U5.18@92,43.288 U5.18@92.013,43.301 ; U5.12@95.282,45.771 95.282,44.578 95.835,44.024 v1(96.545,44.024) ; U5.47@100.282,34.271 100.282,33.114 100.598,32.797 v1@101.957,32.797 ; v1@100.408,43.274 101.678,43.274 101.688,43.265 U5.63@102.109,43.265 ; C13.1@106.859,86.874 C12.1@106.859,89.795 106.884,89.795 C12.1@107.252,90.163 ; 115.032,90.029 115.596,89.465 117.12,89.465 117.632,89.976 ; C21.2@116.967,80.576 C21.2@117.273,80.27 ; C21.2@116.967,80.829 116.982,80.844 116.982,85.807 117.632,86.457 U6.21@117.632,91.065 U6.21@117.628,91.068 ; U6.21@117.641,91.776 117.641,93.211 117.933,93.503 119.711,93.503 v1@120.092,93.122 ; U6.18@119.582,91.065 119.582,92.46 v1@120.092,92.97 ; C15.2@123.317,45.193 C15.2@123.317,45.306 ; VT1.2@128.195,84.847 VT1.2@128.428,84.847
  Top Layer w0.254: C24.2@66.192,83.736 65.075,84.854 65.075,89.146 65.913,89.985 C23.2@67.92,89.985 ; C24.2@68.224,83.203 70.841,83.203 71.736,82.307 U9.2@71.736,80.541 ; U9.22@74.986,87.491 74.986,89.456 75.336,89.807 77.343,89.807 77.586,89.564 ; 75.616,89.756 75.636,89.736 U9.21@75.636,87.491 ; R30.1@76.733,74.541 77.191,74.541 77.586,74.937 77.586,75.888 ; U9.11@77.586,80.541 77.586,78.301 78.145,77.742 78.145,76.435 77.597,75.888 ; U9.18@77.586,87.491 77.586,89.567 79.858,91.839 C28.2@79.858,97.452 ; U9.11@77.622,81.272 v1@77.622,82.492 ; P9.1@87.859,19.652 87.859,35.806 88.822,36.77 91.281,36.77 U5.31@91.282,36.771 ; 114.376,93.236 114.529,93.388 114.884,93.388 115.032,93.241 U6.25@115.032,91.065 ; U6.26@114.382,91.065 114.382,93.241
  Top Layer w0.5: BT1.2@34.112,27.221 44.856,27.221 47.583,29.948 BOOT1.1@47.583,49.409 ; U4.25@36.635,90.253 36.635,107.697 J1.10@42.647,113.708 ; Q2.1@37.88,66.554 38.363,66.071 41.055,66.071 41.055,70.72 ; v3@40.767,79.291 v3@40.767,79.321 ; v3@40.792,79.037 41.08,78.749 41.08,74.987 C4.1@41.868,74.199 ; C4.1@41.842,73.869 41.868,73.844 v1(41.868,72.98) ; v1@41.868,72.929 41.868,71.248 43.123,69.993 48.106,69.993 49.022,70.909 49.022,76.181 49.327,76.485 U1.4@49.327,81.286 ; J1.10@45.023,115.912 46.49,114.445 51.791,114.445 53.391,116.045 J1.9@53.391,116.705 ; 46.033,65.436 C3.1@47.176,65.436 ; C7.1@47.507,53.092 C7.1@47.634,52.965 ; BOOT1.1@47.532,49.384 47.71,49.561 C7.1@47.71,52.711 C7.1@47.634,52.787 ; C7.1@47.701,52.647 47.202,53.146 C3.1@47.202,65.436 49.742,65.436 C1.1@49.767,65.462 ; C1.1@50.123,65.436 54.014,65.436 54.788,66.21 U4.15@54.788,69.207 ; J1.9@53.362,117.182 53.362,119.217 54.483,120.338 65.761,120.338 J1.11@68.072,118.026 ; U4.15@55.042,69.487 55.423,69.106 v2(61.062,69.106) ; BOOT0.1@59.385,49.395 61.773,51.783 C8.1@61.773,52.748 ; C24.2@66.269,82.619 65.913,82.263 v1(65.1,82.263) 63.957,83.406 63.957,94.734 65.049,95.827 65.049,99.205 61.265,102.989 61.265,107.18 68.961,114.877 J1.11@69.063,114.877 ; C26.2@69.164,97.732 69.164,99.357 71.247,101.44 75.748,101.44 77.475,99.713 78.232,99.713 C28.2@79.934,98.011 ; R30.1@76.657,73.652 77.648,72.662 77.648,66.363 P8.2@77.876,66.134 ; C28.2@79.807,97.63 85.166,102.989 U12.8@85.166,111.905 ; U12.11@85.526,125.796 93.521,125.796 U12.10@93.599,125.875 ; v1(93.472,42.932) 95.377,41.027 v1@95.377,39.071 ; v1(102.134,32.975) 102.134,31.132 C16.2@103.759,29.507 ; VT2.2@104.674,94.469 103.835,93.629 103.835,90.976 104.979,89.832 106.832,89.832 C12.1@106.858,89.858 ; VT2.2@104.832,94.748 104.832,97.966 106.172,99.306 109.017,99.306 ; VT2.2@104.832,94.881 VT2.2@104.927,94.785 ; v1@105.588,43.574 106.07,44.056 v1@106.07,51.111 ; v1(106.121,66.605) 106.807,65.919 106.807,51.974 v1@106.147,51.314 ; 108.991,99.306 113.132,103.447 CA2.2@115.621,103.447 ; v1@114.986,44.493 v1(115.011,33.851) ; C10.2@117.45,107.485 117.602,107.485 C10.2@117.627,107.511 ; K2.1@120.904,67.734 123.419,65.22 v3(123.419,46.271) ; v1@123.317,33.952 C15.2@123.317,45.193 ; P3.20@125.908,30.422 126.009,30.32 P3.4@146.228,30.32 ; K1.1@127.066,93.097 127.864,92.299 127.864,88.982 v1(127.914,88.931) ; K1.1@127.152,93.515 130.48,96.843 CA4.2@140.716,96.843 ; v1(127.94,84.004) 127.94,84.41 VT1.2@128.27,84.74 ; P4.2@129.261,124.3 129.845,124.3 139.649,114.496 150.317,114.496 151.562,113.251 R27.1@151.562,110.076 ; P3.12@136.068,30.574 P3.11@136.068,32.86 ; R24.1@140.589,92.601 140.589,96.614 CA4.2@140.614,96.639 ; CA4.2@141.097,98.417 141.097,99.408 C27.2@142.57,100.881 142.57,101.897 144.043,103.37 U10.3@144.043,104.183 ; U10.3@144.091,104.183 144.091,107.913 146.101,109.924 R27.1@151.486,109.924 ; P3.4@146.253,30.218 146.253,28.694 146.939,28.009 149.987,28.009 151.232,29.253 151.232,37.915 149.581,39.566 149.581,64.915 150.063,65.397 U3.32@152.697,65.397 ; 149.606,64.153 149.631,64.127 U3.31@152.697,64.127 ; 149.631,62.908 149.682,62.857 U3.30@152.697,62.857
  Top Layer w0.8: 41.055,70.72 R8.1@41.284,70.948
  Top Layer w1: P6.4@110.515,120.719 110.033,120.719 108.433,119.118 108.433,109.339 110.287,107.485 CA3.2@112.598,107.485 ; CA3.2@112.801,107.409 112.801,105.707 113.309,105.199 115.138,105.199 CA2.2@116.027,104.31 ; CA3.2@112.801,107.434 112.852,107.485 117.45,107.485 C10.2@117.704,107.739 ; C11.2@116.23,110.254 116.23,109.365 C10.2@117.831,107.765 ; U7.1@121.209,115.118 121.425,115.118 124.155,117.848 P4.1@124.155,120.49 ; C15.2@123.114,45.103 C15.2@123.317,45.306 ; C15.2@123.317,44.976 C15.2@123.571,45.23
  Bottom Layer w0.24: U11.4@27.534,41.687 U11.4@27.94,41.687 ; v1(29.904,63.658) v1@29.981,63.658 ; U2.25@32.613,75.012 U2.21@34.613,75.012 34.613,79.063 ; U2.42@40.589,71.99 40.613,72.014 40.613,72.294 41.299,72.98 v1@41.834,72.98 ; U2.8@41.113,75.012 41.131,75.012 41.131,73.768 41.834,73.065 v1@41.834,73.056 ; 42.113,73.226 U2.6@42.113,75.012 ; Q1.1@42.122,65.854 Q1.1@42.122,66.071 ; C18.2@99.544,52.711 C18.2@99.568,52.711 ; v1(120.168,93.097) K1.1@127.026,93.097
  Bottom Layer w0.254: v1(71.73,82.466) 77.47,82.466 v1@77.521,82.415
  Bottom Layer w0.5: U11.4@27.393,41.687 U11.4@27.407,41.674 ; U11.4@27.534,41.687 29.083,41.687 29.616,41.154 29.616,30.853 33.198,27.272 BT1.2@33.249,27.272 ; U11.4@27.94,41.687 27.94,42.537 28.88,43.477 28.88,53.155 22.377,59.657 22.377,62.273 23.851,63.746 v1@29.769,63.746 ; v1@29.82,63.633 29.82,65.055 30.48,65.716 30.48,66.605 31.826,67.951 31.826,74.953 32.419,75.546 32.419,78.797 32.928,79.306 35.905,79.306 v1@36.652,80.053 ; CA1.2@30.48,65.894 31.496,64.878 32.385,64.878 C6.1@34.823,67.316 ; C6.1@34.773,67.646 C6.1@34.798,67.621 ; v3@40.843,79.215 47.366,79.215 50.148,81.997 v1@50.267,81.997 ; v1@41.03,66.071 Q1.1@42.122,66.071 ; Q1.1@42.342,65.792 42.342,65.634 43.226,64.751 45.288,64.751 v1@45.618,65.081 ; BOOT1.1@47.583,49.409 47.583,50.369 48.895,51.681 57.785,51.681 59.131,50.335 BOOT0.1@59.131,49.624 ; v1@50.267,82.023 64.86,82.023 v1(65.1,82.263) ; v2(61.062,69.106) 61.062,68.776 64.197,65.64 P8.2@77.953,65.64 ; J1.11@67.996,113.581 67.843,113.581 61.443,107.18 61.443,104.717 64.719,101.44 75.748,101.44 75.748,105.382 78.105,107.739 C29.2@78.13,107.739 ; P8.2@77.979,65.894 79.372,67.287 105.339,67.287 v1@106.058,66.567 ; C29.2@78.689,108.679 78.689,121.608 81.102,124.021 84.023,124.021 U12.11@85.496,125.494 ; v1(92.914,38.919) v1(95.352,38.919) ; v1(93.472,42.932) 95.529,42.932 v1@96.545,43.948 ; U12.10@93.696,125.796 95.32,124.173 100.889,124.173 102.489,125.773 109.677,125.773 110.769,124.681 ; C14.2@94.107,52.494 94.107,51.91 95.225,50.792 98.12,50.792 C18.2@99.797,52.469 ; C31.1@96.368,94.938 C30.1@100.076,94.938 ; v1@96.571,43.999 96.571,43.172 97.79,41.953 99.072,41.953 v1@100.228,43.109 ; P10.7@99.492,99.408 103.454,103.37 103.454,113.429 P6.4@110.719,120.693 ; C18.2@99.543,52.672 102.159,52.672 102.337,52.494 102.337,52.428 103.736,51.029 v1@105.887,51.029 ; v1@100.264,43.221 v1@105.445,43.221 ; C30.1@100.266,95.153 99.441,95.979 99.441,99.357 126.441,99.357 K1.4@126.975,98.824 ; v1(102.134,32.975) 114.237,32.975 v1@114.986,33.724 ; v1@105.588,43.415 114.212,43.415 v1@115.151,44.354 ; v1(115.011,33.851) v1@123.317,33.851 ; K2.1@120.447,67.915 126.14,67.915 K2.4@126.162,67.937 ; v1(123.317,33.876) 123.317,30.625 123.647,30.295 P3.20@125.451,30.295 ; K1.4@127.102,98.71 127.483,98.329 127.483,93.503 K1.1@127.356,93.376 ; v1(127.914,88.931) 127.914,84.029 v1(127.94,84.004)
  Bottom Layer w1: P6.4@110.973,120.744 110.973,124.605 112.344,125.976 120.853,125.976 123.901,122.928 P4.1@123.901,122.293 ; P4.1@124.282,121.354 124.282,122.039 P4.2@127.229,124.986 ; P4.2@127.152,124.91 P4.2@128.727,124.91
  other v1: 100.254,43.211 105.461,43.313 114.986,44.595 106.07,51.212 45.703,65.132 40.742,66.097 36.728,80.104 50.275,82.023 77.597,82.39
  other v3: 40.792,79.19 75.616,101.694
GPIO05: U3.15 VT2.3 | length 84.9
  Top Layer w0.24: v2(105.08,88.461) 105.091,88.449 105.091,70.491 v1(105.308,70.274) ; v2(105.105,91.178) 105.105,91.864 105.782,92.541 VT2.3@105.782,92.648 ; v1@124.841,70.376 124.841,45.789 125.298,45.331 v1(125.806,45.331) ; U3.15@139.878,48.26 139.878,45.458 v1@139.954,45.382
  Bottom Layer w0.24: v2(105.08,88.461) 105.105,88.486 v2(105.105,91.178) ; v1@105.308,70.3 v1(124.689,70.3) ; v1(125.806,45.331) 125.806,45.306 v1(139.903,45.306)
I2C1_SCL: R28.2 U5.58 U11.6 | length 102.3
  Top Layer w0.24: R28.2@25.781,52.012 v1@29.921,52.012 ; v1@83.516,43.364 83.516,35.693 v1@83.592,35.617 ; v1@100.584,38.335 v1(100.66,38.335) ; v1@100.66,38.436 100.66,39.652 101.756,40.748 U5.58@102.338,40.748
  Bottom Layer w0.24: v1@29.934,51.999 30.201,51.732 30.201,42.106 31.877,40.429 32.636,40.429 U11.6@32.648,40.417 ; U11.6@33.452,40.404 36.471,40.404 37.321,39.554 37.321,36.624 38.608,35.337 38.583,35.337 ; 38.608,35.324 38.989,34.943 82.714,34.943 83.413,35.642 v1(83.618,35.642) 83.77,35.795 99.798,35.795 100.433,36.43 100.433,38.132 v1@100.635,38.335 ; v1@83.631,35.579 v1@83.719,35.668 ; v1@100.584,38.335 v1@100.635,38.335 ; v1(100.66,38.335) v1@100.635,38.335 ; v1@100.686,38.385 v1@100.635,38.335
  other v1: 83.542,43.389 29.87,51.885
I2C1_SDA: R29.2 U5.59 U11.5 | length 102.7
  Top Layer w0.254: R29.2@25.857,54.882 26.035,55.06 v1@30.759,55.06 ; v1@82.729,36.074 82.729,43.897 v1@83.034,44.202 ; v1@99.771,39.173 99.771,39.471 101.556,41.256 U5.59@102.973,41.256
  Bottom Layer w0.254: v1@30.836,55.034 30.734,54.933 30.734,42.817 31.863,41.687 U11.5@33.765,41.687 ; U11.5@33.477,41.674 34.595,41.674 36.837,43.916 82.696,43.916 v1@82.856,44.075 ; v1@82.767,36.01 83.11,36.353 98.942,36.353 99.615,37.026 v1@99.615,38.847
  other v1: 82.78,35.998 99.695,38.944 83.034,44.253 30.759,55.136
JNTRST: P3.3 U5.56 | length 50.7
  Top Layer w0.24: U5.56@102.782,39.771 102.98,39.771 102.994,39.757 109.169,39.757 110.426,41.013 v1@110.846,41.013
  Bottom Layer w0.24: v1(110.947,40.963) 111.328,40.963 111.938,40.353 144.958,40.353 146.253,39.058 P3.3@146.253,33.012
JTCK: P3.9 U5.49 | length 38.2
  Top Layer w0.24: U5.49@103.003,36.264 109.144,36.264 v1(109.499,35.908) ; v1(138.354,35.654) 138.43,35.578 P3.9@138.43,33.419
  Bottom Layer w0.24: v1(109.499,35.908) 109.971,35.437 138.314,35.437 138.354,35.476 v1(138.354,35.654)
JTDI: P3.5 U5.50 | length 44
  Top Layer w0.24: U5.50@102.782,36.771 108.457,36.771 ; 108.458,36.772 109.626,36.772 109.728,36.772 110.363,36.137 v1(110.49,36.137)
  Bottom Layer w0.24: v1(110.49,36.137) 110.706,36.353 142.735,36.353 143.713,35.375 P3.5@143.713,33.063
JTDO: P3.13 U5.55 | length 35.8
  Top Layer w0.24: U5.55@103.53,39.263 109.679,39.263 v1@109.931,39.515 ; v1(133.477,38.829) 133.528,38.778 P3.13@133.528,33.317
  Bottom Layer w0.24: v1@110.033,39.489 110.287,39.489 111.023,38.753 133.401,38.753 v1(133.477,38.829)
  other v1: 110.134,39.718
JTMS: P3.7 U5.46 | length 44.1
  Top Layer w0.24: U5.46@99.812,34.539 99.812,35.303 100.151,35.642 108.763,35.642 109.372,35.033 v1(109.372,34.943)
  Bottom Layer w0.24: v1(109.372,34.943) 140.487,34.943 141.148,34.282 P3.7@141.148,33.089
L: 
LPG: R15.2 U2.13 U4.30 U5.57 | length 146.6
  Top Layer w0.24: v1(26.34,79.012) 26.518,78.834 39.319,78.834 v1@39.345,78.859 ; v1(38.613,76.435) 38.82,76.228 R15.2@38.82,73.945 ; v1(70.587,76.929) 70.739,76.777 v1(70.739,68.445) ; U5.57@102.782,40.271 108.984,40.271 110.351,41.637 v1@110.351,67.887
  Bottom Layer w0.24: v1@26.391,79.037 26.467,79.113 26.467,89.934 U4.30@26.645,90.112 ; U2.13@38.613,75.012 v1(38.613,76.435) 39.624,77.445 39.624,78.529 v1@39.319,78.834 ; v1@38.659,76.421 39.778,77.54 46.856,77.54 47.467,76.929 v1(70.587,76.929) ; v1(70.739,68.445) 71.247,67.937 v1(110.312,67.937)
  other v1: 39.319,78.758
N: 
NetBT1_1: BT1.1 D3.1 | length 12.8
  Top Layer w0.24: BT1.1@33.503,47.465 33.503,45.687 38.786,40.404 v1(38.786,38.575)
  Bottom Layer w0.24: v1@38.938,38.6 39.887,37.652 D3.1@39.887,37.244
NetC1_2: C1.2 R1.2 U2.1 | length 13.2
  Top Layer w0.24: C1.2@50.123,67.722 50.123,70.618 50.123,70.923 R1.2@50.504,71.304 ; v1(50.504,70.618) R1.2@50.504,71.304 ; R1.2@50.504,71.786 R1.2@50.504,71.304
  Bottom Layer w0.24: U2.1@44.613,75.012 44.613,74.07 45.017,73.666 47.456,73.666 v1(50.504,70.618)
NetC2_2: C2.2 R2.2 U2.3 | length 17.3
  Top Layer w0.24: v1(51.977,71.736) 52.028,71.786 R2.2@53.425,71.786 53.425,69.754 53.044,69.373 C2.2@53.044,67.722
  Bottom Layer w0.24: U2.3@43.613,75.012 43.613,76.181 43.892,76.459 ; 43.917,76.46 45.398,76.46 50.123,71.736 v1(51.977,71.736)
NetC3_2: C3.2 R3.2 U2.4 | length 17.1
  Top Layer w0.24: v1(46.059,68.586) 46.084,68.561 47.202,68.561 C3.2@47.202,67.722 ; v1(46.059,71.786) 46.821,71.786 ; v1(46.567,76.841) 46.567,72.04 46.821,71.786 ; R3.2@47.583,71.786 46.821,71.786
  Bottom Layer w0.24: U2.4@43.113,75.012 43.113,76.659 43.409,76.954 46.454,76.954 v1(46.567,76.841) ; v1(46.059,68.586) v1(46.059,71.786)
NetC18_1: C18.1 U5.6 Y1.1 | length 14.3
  Top Layer w0.24: U5.6@98.282,45.771 98.282,55.869 98.282,55.907 Y1.1@98.4,56.025
  Top Layer w0.254: Y1.1@98.282,55.869 Y1.1@98.401,55.988
  Bottom Layer w0.254: C18.1@97.258,52.711 97.258,54.807 Y1.1@98.323,55.872 ; Y1.1@98.374,55.923 Y1.1@98.323,55.872 ; Y1.1@98.401,55.988 98.401,55.872 Y1.1@98.323,55.872
NetC19_2: C19.2 U5.5 Y1.2 | length 15.6
  Top Layer w0.24: U5.5@98.782,45.828 98.781,45.829 98.781,51.288 Y1.2@103.481,55.988
  Bottom Layer w0.254: Y1.2@103.48,55.822 104.37,54.932 C19.2@104.37,52.711
NetC21_1: C21.1 U6.4 U6.17 | length 19.2
  Top Layer w0.24: U6.4@115.032,83.826 v1@115.032,85.443 ; C21.1@115.418,80.383 115.419,80.382 v1@115.419,79.152 ; U6.17@120.232,91.065 120.232,87.812 v1@120.472,87.572
  Bottom Layer w0.24: v1@114.871,85.527 116.574,87.23 v1@120.384,87.23 ; v1(114.91,85.489) 114.91,79.469 v1(115.291,79.088)
  other v1: 120.625,87.368
NetC24_1: C24.1 U9.1 | length 4.4
  Top Layer w0.254: C24.1@68.402,78.732 68.631,78.504 70.46,78.504 71.086,79.13 U9.1@71.086,80.541
NetC25_2: C25.2 U11.1 Y3.2 | length 11.2
  Bottom Layer w0.24: Y3.2@21.819,42.207 22.047,41.979 22.047,39.439 23.622,37.864 U11.1@27.153,37.864 ; C25.2@27.381,35.298 27.407,35.324 U11.1@27.407,37.864
NetC26_1: C26.1 U9.24 Y4.1 | length 10.4
  Top Layer w0.24: C26.1@71.374,97.63 71.374,93.947 Y4.1@71.653,93.668
  Top Layer w0.254: Y4.1@71.907,93.083 73.686,91.305 U9.24@73.686,87.491
NetC28_1: C28.1 U9.23 Y4.2 | length 11.2
  Top Layer w0.254: U9.23@74.336,87.491 74.336,90.915 Y4.2@76.632,93.21 ; Y4.2@76.962,93.363 77.521,93.922 C28.1@77.521,97.63
NetC30_2: C30.2 L1.2 R31.1 R32.1 | length 23.9
  Top Layer w0.254: R31.1@82.575,95.547 82.728,95.395 84.15,95.395 v1(84.15,95.319) ; R32.1@87.147,91.458 v1(87.147,92.372) ; v1(93.726,88.08) 93.726,90.747 v1@93.828,90.848
  Bottom Layer w0.254: v1(84.15,95.319) 87.097,92.372 v1(87.147,92.372) 88.646,90.874 99.009,90.874 99.695,91.559 C30.2@99.695,92.372
  other v1: 93.777,90.95
NetC31_2: C31.2 R33.1 R34.1 | length 26
  Top Layer w0.254: v1(82.779,82.771) 82.779,81.069 83.236,80.612 83.668,80.612 R33.1@84.099,80.18 ; v1(82.855,84.803) 82.855,87.241 83.007,87.394 R34.1@84.328,87.394 84.658,87.724 86.589,87.724 88.57,89.705 88.57,92.906 v1(88.316,93.16)
  Bottom Layer w0.254: v1@82.804,82.695 v1@82.804,84.803 ; v1(88.316,93.16) 95.758,93.16 C31.2@95.987,92.931
NetC32_2: 
NetC33_2: 
NetC34_2: 
NetC35_2: 
NetC36_2: 
NetC37_2: 
NetCA1_1: CA1.1 U2.18 | length 21.4
  Top Layer w0.24: v1(28.761,77.146) 34.248,77.146 34.98,77.878 v1@35.962,77.878
  Bottom Layer w0.24: CA1.1@26.899,66.96 27.999,68.061 27.999,76.384 v1(28.761,77.146) ; v1@35.89,77.882 36.113,77.659 U2.18@36.113,75.012
  other v1: 35.89,77.933
NetD1_1: D1.1 P6.1 U6.20 | length 53.6
  Top Layer w0.254: U6.20@118.282,91.065 118.282,92.696 118.389,92.804 v1(118.415,92.804)
  Top Layer w0.5: v1@115.748,92.982 115.748,99.689 D1.1@116.027,99.968 ; v1(124.358,93.922) 124.562,94.125 v1@124.562,103.142
  Bottom Layer w0.254: P6.1@110.452,117.607 P6.1@110.515,117.671
  Bottom Layer w0.5: P6.1@110.388,117.671 109.626,116.909 109.626,109.136 111.862,106.901 120.879,106.901 v1(124.587,103.193) ; v1(115.773,93.007) v1@118.288,93.007 ; v1(118.415,92.804) 119.634,94.023 124.333,94.023 v1@124.358,93.998
NetD2_2: D2.2 D3.2 U11.8 | length 10.9
  Bottom Layer w0.24: U11.8@32.648,37.877 36.077,37.877 D3.2@36.077,37.244 D3.2@36.077,36.213 ; D2.2@36.119,30.372 D3.2@36.119,36.213